# Altium PCB PCB1.2.PcbDoc (part 2 of 2)
Units mil, origin at the board's own origin, x right, y up, seen from the top; angles counter-clockwise.
Board outline 1692.91 x 1692.91 mil, 4 copper layers (Top Layer, Mid-Layer 1, Mid-Layer 2, Bottom Layer); 153 components, 106 nets, 555 pads, 234 vias.
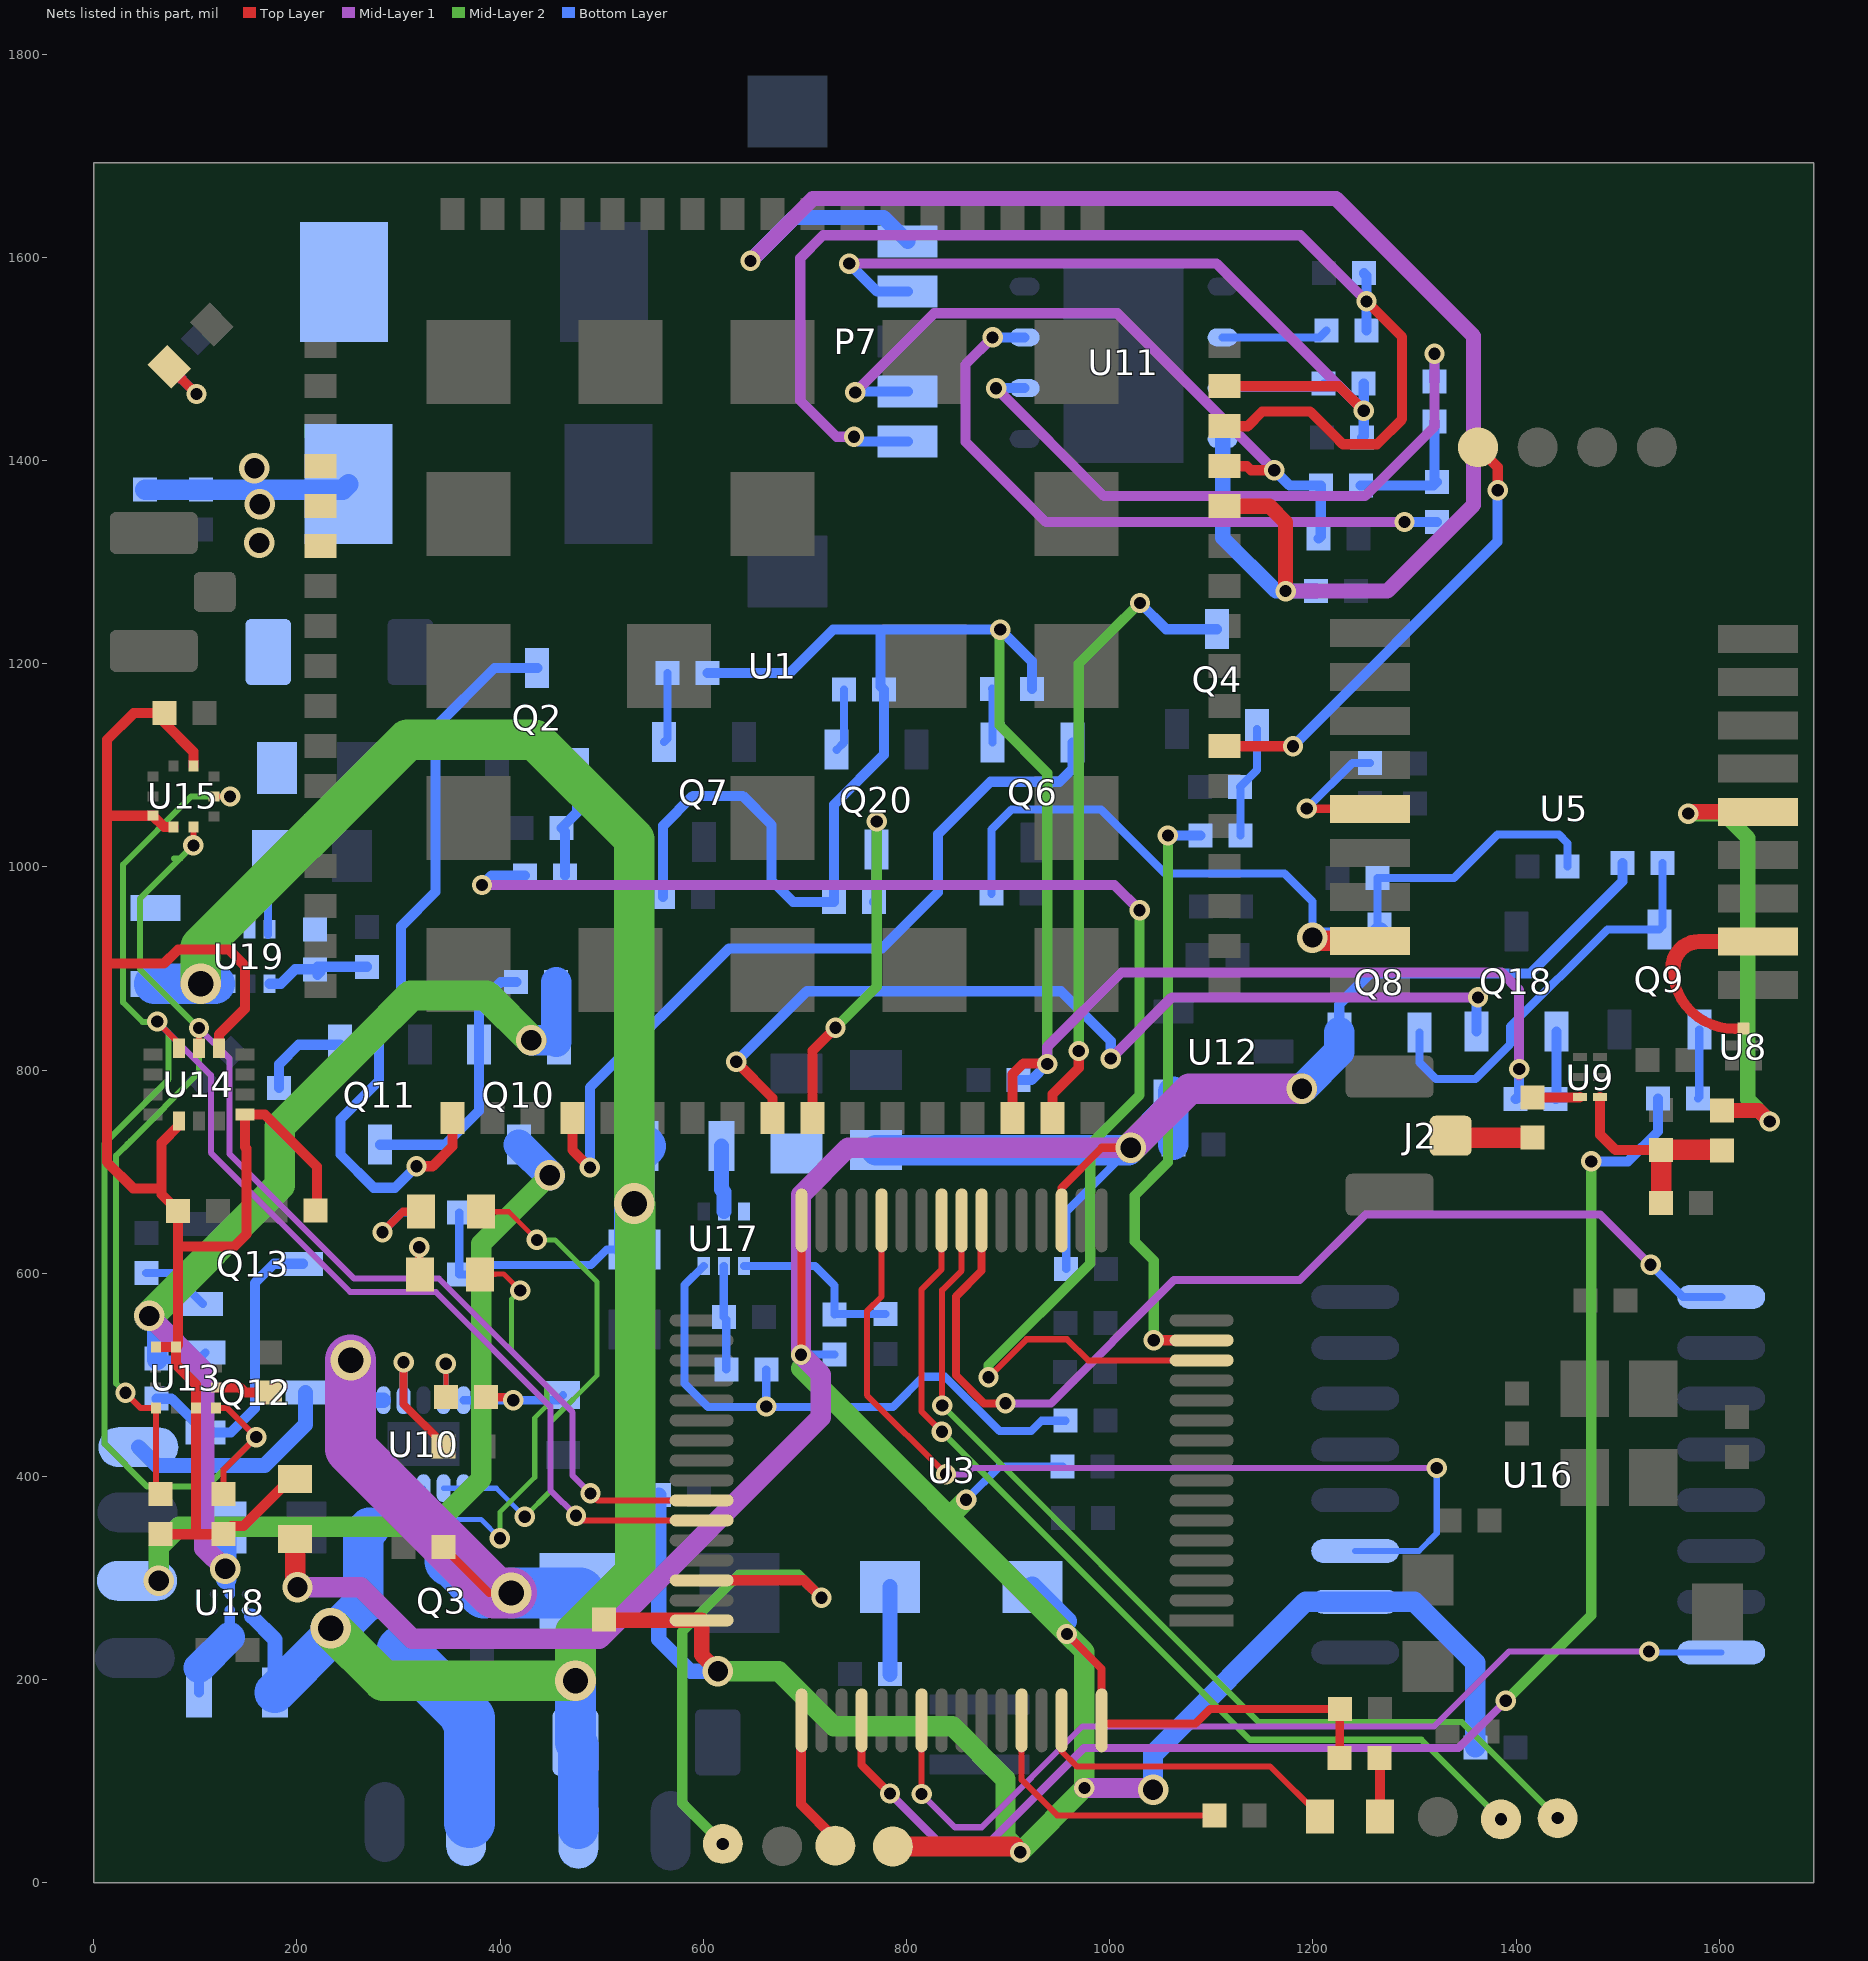
[diagram p4: the nets of this part, all layers, seen from the top]

## Via types
v1: diameter 20, hole 12, Top Layer to Bottom Layer, tented both sides, 205 vias
v2: diameter 30, hole 20, Top Layer to Bottom Layer, tented both sides, 22 vias
v3: diameter 40, hole 25, Top Layer to Bottom Layer, tented both sides, 7 vias

## Nets (pads, with @x,y where several pads share a name; then routed paths per layer and width w, separated by ;. In a path a pad name is that pad's centre, name@x,y a point inside that pad or via, vN(x,y) a via of type N, cw(c..) or ccw(c..) an arc to the next point about the centre after c; other vN are vias at no path point) (continued)
NetC27_1: C27.1 D2.2 Q3.3 U10.1 | length 548
  Top Layer w8: C27.1@344.14,330.73 389.4,285.46
  Mid-Layer 1 w50: v3(252.94,514.63) 252.94,427.38 394.85,285.46 v3(411.18,285.46)
  Bottom Layer w15: 252.94,485.68 263.44,475.18 U10.1@285.42,475.18
  Bottom Layer w40: 252.94,485.68 v3(252.94,514.63)
  Bottom Layer w50: Q3.3@350.85,316.89 353.06,316.89 384.49,285.46 ; v3(411.18,285.46) D2.2@478.46,285.46
NetC40_1: C40.1 U13.5 | length 54.7
  Top Layer w10: U13.5@121.05,487.53 144.24,487.53 149.13,482.65 C40.1@173.68,482.65
NetD1_2: D1.2 R7.1 | length 86
  Bottom Layer w15: R7.1@783.93,205.5 D1.2@783.93,291.5
NetJ2_1: J2.1 L3.2 | length 81.2
  Top Layer w20: J2.1@1335.61,735.51 1337.51,733.61 L3.2@1415.99,733.61
NetL2_1: L2.1 U5.14 | length 477.7
  Top Layer w15: v1(1569.58,1052.51) 1571.35,1054.28 U5.14@1638.34,1054.28 ; L2.1@1602.59,760.37 1638.95,760.37 v1(1649.81,749.51)
  Mid-Layer 2 w15: v1(1569.58,1052.51) 1604.11,1052.51 1628.15,1028.46 1628.15,771.17 v1(1649.81,749.51)
NetL3_1: L3.1 U9.3 | length 47.4
  Top Layer w10: L3.1@1415.99,772.98 1462.52,772.98 U9.3@1463.11,773.56
NetL4_1: L4.1 U17.5 | length 65.4
  Bottom Layer w15: L4.1@618.1,725.29 618.1,682.53 620.49,680.14 U17.5@620.49,660.92
NetL5_2: L5.2 U18.B1 | length 93.6
  Bottom Layer w10: L5.2@103.63,187.47 L5.2@103.63,211.66 ; 133.93,241.96 U18.B1@133.93,268.51
  Bottom Layer w30: L5.2@103.63,211.66 133.93,241.96
NetL6_1: L6.1 U19.5
NetLED1_2: LED1.2 R9.1 | length 75.7
  Top Layer w10: LED1.2@74.52,1492.25 v1(101.27,1465.5)
  Bottom Layer w10: R9.1@74.52,1492.25 v1(101.27,1465.5)
NetLED2_1: LED2.1 R29.2 | length 90.5
  Top Layer w8: v1(284.31,640.55) 304.43,660.67 LED2.1@322.31,660.67
  Bottom Layer w8: v1(284.31,640.55) 303.64,659.88 R29.2@320.45,659.88
NetLED2_2: LED2.2 U10.6 U10.7 | length 510.4
  Top Layer w5: LED2.2@381.37,660.67 408.62,660.67 ; 419.55,649.74 408.62,660.67 ; v1(436.28,633.01) 408.62,660.67
  Mid-Layer 2 w5: v1(424.43,360.52) 449.62,385.71 449.62,453.67 495.61,499.66 495.61,591.52 454.12,633.01 v1(436.28,633.01)
  Bottom Layer w5: U10.7@344.48,388.56 U10.6@364.16,388.56 396.38,388.56 v1(424.43,360.52)
NetLED4_1: LED4.1 R12.2 | length 54.1
  Top Layer w8: v1(320.45,625.74) 320.45,599.85 LED4.1@321.42,598.88
  Bottom Layer w8: R12.2@320.45,598.88 v1(320.45,625.74)
NetLED4_2: LED4.2 U10.8 | length 446.7
  Top Layer w5: 395.4,598.88 LED4.2@380.48,598.88 381.17,599.57 403.46,599.57 v1(419.94,583.09)
  Mid-Layer 2 w5: v1(399.84,339.28) 399.84,364.94 434.2,399.3 434.2,457.81 446,469.62 446,488.88 411.37,523.51 411.37,574.52 v1(419.94,583.09)
  Bottom Layer w5: U10.8@324.79,388.56 324.79,373.35 340.21,357.93 381.19,357.93 v1(399.84,339.28)
NetLED5_1: LED5.1 R65.1 | length 57.6
  Top Layer w10: R65.1@1265.84,122.92 1266.17,122.59 LED5.1@1266.17,65.51
NetLED5_2: LED5.2 U3.62 | length 311.5
  Top Layer w6: U3.62@952.78,160.11 952.78,129.42 967.45,114.75 1143.11,114.75 1157.87,114.75 LED5.2@1207.11,65.51
NetQ2_1: Q2.1 R10.1 R11.1 | length 113.5
  Bottom Layer w10: R10.1@463.84,991.78 463.84,1035.01 R11.1@460.5,1038.36 475.97,1053.83 Q2.1@475.97,1097.49
NetQ4_1: Q4.1 R4.1 R16.1 | length 111.7
  Bottom Layer w8: R16.1@1128.89,1031.08 1128.89,1078.28 R4.1@1128.41,1078.75 1145.18,1095.52 Q4.1@1145.18,1135.64
NetQ6_1: Q6.1 R28.1 | length 53.1
  Bottom Layer w8: R28.1@884.13,1175.39 884.79,1174.72 Q6.1@884.79,1122.61
NetQ7_1: Q7.1 R31.1 | length 69.5
  Bottom Layer w8: Q7.1@561.39,1122.86 564.73,1126.2 R31.1@564.73,1190.95
NetQ8_1: Q8.1 Q9.3 R33.2 | length 405.9
  Bottom Layer w8: Q8.1@1304.83,837.26 1304.83,807.75 1321.37,791.21 1359.95,791.21 1394.11,825.37 1394.11,842.89 1489.87,938.65 Q9.3@1540.98,938.65 ; Q9.3@1544.19,941.86 R33.2@1544.19,1003.9
NetQ9_1: Q9.1 R34.1 | length 68.5
  Bottom Layer w8: R34.1@1579.09,772.22 1580.35,773.48 Q9.1@1580.35,840.22
NetQ10_1: Q10.1 Q11.3 R36.2 | length 262.2
  Bottom Layer w10: Q11.3@281.74,726.64 345.85,726.64 379.26,760.05 Q10.1@379.26,825.07 379.26,865.45 400.45,886.64 R36.2@415.92,886.64
NetQ11_1: Q11.1 R37.1 | length 95.6
  Bottom Layer w10: R37.1@182.56,782.38 182.56,805.99 201.63,825.07 Q11.1@239.36,825.07 ; Q11.1@239.36,825.07 240.87,823.56 Q11.1@242.37,825.07 Q11.1@239.36,825.07
NetQ12_1: Q12.1 Q13.3 R50.2 | length 299.2
  Bottom Layer w10: R50.2@61.74,476.66 76.78,476.66 Q12.1@110.01,443.42 134.9,443.42 158.78,467.3 158.78,590.63 177.58,609.43 Q13.3@206.12,609.43
NetQ13_1: Q13.1 R51.1 | length 68.4
  Bottom Layer w8: R51.1@51.85,600.34 77.41,600.34 Q13.1@107.7,570.06
NetQ18_1: Q18.1 R40.1 | length 66.9
  Bottom Layer w10: R40.1@1439.1,771.53 1439.74,772.17 Q18.1@1439.74,838.2
NetQ20_1: Q20.1 R44.1 | length 62.2
  Bottom Layer w8: Q20.1@731.43,1115.4 738.48,1122.44 R44.1@738.48,1174.67
NetR3_1: R3.1 U3.60 | length 263.1
  Top Layer w6: U3.60@913.41,160.11 913.41,101.53 948.37,66.57 R3.1@1103.44,66.57
NetR13_1: R13.1 U10.2 | length 136.4
  Top Layer w8: v1(305.11,512.47) 305.11,471.24 344.42,431.93 R13.1@344.42,429.61
  Bottom Layer w8: U10.2@305.11,475.18 v1(305.11,512.47)
NetR14_1: R14.1 R15.2 U10.5 | length 128.2
  Top Layer w8: R14.1@386.04,478.12 410.1,478.12 v1(413.05,475.18)
  Bottom Layer w8: U10.5@364.16,475.18 v1(413.05,475.18) 457.2,475.18 R15.2@462.09,480.07
NetR14_2: R14.2 U10.4 | length 69.8
  Top Layer w5: R14.2@346.67,478.12 v1(346.67,511.1)
  Bottom Layer w5: U10.4@344.48,475.18 346.67,477.37 v1(346.67,511.1)
NetR18_1: R18.1 U5.5 | length 143.6
  Top Layer w8: v1(1194,1057.6) 1194.32,1057.28 U5.5@1256.45,1057.28
  Bottom Layer w8: v1(1194,1057.6) 1238.91,1102.51 R18.1@1256.45,1102.51
NetR19_2: R19.2 R20.2 U19.1 | length 106.4
  Bottom Layer w10: U19.1@173.26,885.12 184.13,885.12 198.34,899.33 R19.2@218.11,899.33 220.58,901.81 R20.2@268.86,901.81 ; R19.2@220.26,893.96 R19.2@223.01,896.72
NetR21_2: R21.2 R48.2 U17.1 | length 175.9
  Bottom Layer w8: U17.1@640.18,607.35 710.1,607.35 729.29,588.16 R21.2@729.29,559.66 729.71,560.07 R48.2@779.48,560.07
NetR23_2: R23.2 U11.7 | length 101.3
  Bottom Layer w8: U11.7@1111.27,1471.29 1206.3,1471.29 R23.2@1210.73,1475.71
NetR25_1: R25.1 U11.3 | length 641.9
  Mid-Layer 1 w10: v1(884.82,1521.29) 858.21,1494.67 858.21,1418.56 937.27,1339.5 981.2,1339.5 v1(1290.33,1339.5)
  Bottom Layer w10: v1(884.82,1521.29) U11.3@916.39,1521.29 ; v1(1290.33,1339.5) R25.1@1322.06,1339.5
NetR25_2: R25.2 R26.2 R27.2 | length 136.8
  Bottom Layer w10: R27.2@1247.24,1375.58 1318.77,1375.58 R25.2@1322.06,1378.87 1319.7,1381.24 R26.2@1319.7,1438.52
NetR26_1: R26.1 U11.2 | length 630.7
  Mid-Layer 1 w10: v1(888.28,1471.29) 994.34,1365.22 1251.46,1365.22 1319.7,1433.46 v1(1319.7,1505.17)
  Bottom Layer w10: v1(888.28,1471.29) U11.2@916.39,1471.29 ; R26.1@1319.7,1477.89 v1(1319.7,1505.17)
NetR35_2: R35.2 R49.2 U17.2 | length 103
  Bottom Layer w8: U17.2@620.49,607.35 620.24,607.09 R35.2@620.24,557 622.72,554.53 R49.2@622.72,505.47
NetR39_2: R39.2 U11.6 | length 105.1
  Bottom Layer w8: U11.6@1111.27,1521.29 1206.53,1521.29 R39.2@1213.46,1528.22
POWER_CTRL_GPS: R34.2 U3.52 | length 1459.8
  Top Layer w8: U3.52@755.93,160.11 755.93,116.03 v1(783.79,88.16)
  Mid-Layer 1 w8: v1(783.79,88.16) 821.87,50.09 ; 809.35,62.61 821.87,50.09 ; v1(1389.88,179.29) 1343.47,132.88 974.72,132.88 883.48,41.65 830.31,41.65 821.87,50.09
  Mid-Layer 2 w10: v1(1389.88,179.29) 1474.01,263.42 v1(1474.01,710.23)
  Bottom Layer w10: v1(1474.01,710.23) 1510.31,710.23 1539.72,739.65 R34.2@1539.72,772.22
PWRKEY: Q2.3 U1.1 | length 752
  Top Layer w10: v1(317.77,705.47) 333.7,705.47 353.28,725.05 U1.1@353.28,752.75
  Bottom Layer w10: v1(317.77,705.47) 296.67,684.37 275.65,684.37 243,717.02 243,751.85 281.03,789.88 281.03,843 302.65,864.62 302.65,941.73 336.37,975.45 336.37,1137.7 394.59,1195.91 Q2.3@436.6,1195.91
RESET: Q4.3 U1.16 | length 644.8
  Top Layer w10: U1.16@943.83,752.75 943.83,776.25 969.68,802.1 v1(969.68,818.91)
  Mid-Layer 2 w10: v1(969.68,818.91) 969.68,1199.97 1000.79,1231.09 ; 1011.6,1241.9 1000.79,1231.09 ; v1(1029.86,1259.82) 1029.53,1259.82 1000.79,1231.09
  Bottom Layer w10: v1(1029.86,1259.82) 1055.62,1234.07 Q4.3@1105.81,1234.07
RF_IN: U5.11 U8.1 | length 202.3
  Top Layer w10: 1554.41,900.63 ccw(c1614.21,900.63) U8.1@1623.77,841.6
  Top Layer w15: 1554.41,900.63 cw(c1580.39,900.63) 1580.39,926.61 U5.11@1638.33,926.61
RI: Q6.2 U1.4 | length 798.6
  Top Layer w10: U1.4@471.39,752.75 471.39,721.34 v1(488.45,704.27)
  Bottom Layer w10: v1(488.45,704.27) 488.45,782.89 625.51,919.94 775.96,919.94 831.15,975.13 831.15,1032.33 882.76,1083.94 950.69,1083.94 963.53,1096.78 Q6.2@963.53,1122.61
RXD3: T18.1 U3.25 | length 933
  Top Layer w6: U3.25@834.67,652.24 834.67,604.06 814.73,584.12 814.73,464.25 v1(834.91,444.06)
  Mid-Layer 2 w6: v1(834.91,444.06) 1093.79,185.18 1138.02,140.95 1306.93,140.95 v1(1385.16,62.72)
SCL: R22.2 U3.42 U13.1 U14.13 U15.2 | length 1572.6
  Top Layer w6: v1(31.31,482.48) 46.43,467.35 U13.1@61.5,467.35 61.5,387.16 R22.2@65.98,382.68 ; v1(98.22,1021.3) U15.2@98.22,1039.41 ; U14.13@103.64,821.61 v1(103.64,841.48) ; v1(488.98,383.49) 495.82,376.65 U3.42@598.45,376.65
  Mid-Layer 1 w6: v1(103.64,841.48) 133.91,811.22 133.91,717.42 256.55,594.78 339.93,594.78 471.47,463.24 471.47,401 v1(488.98,383.49)
  Mid-Layer 2 w6: v1(31.31,482.48) 22.04,491.75 22.04,715.85 36.38,730.19 ; 33.15,726.96 36.38,730.19 ; 79.4,1008.44 85.36,1008.44 ; v1(98.22,1021.3) 85.36,1008.44 ; 36.38,730.19 103.64,797.45 v1(103.64,841.48) 45.59,899.54 45.59,968.67 85.36,1008.44
SCLK: U3.55 U16.16 | length 945.2
  Top Layer w6: v1(814.99,87.56) U3.55@814.99,160.11
  Mid-Layer 1 w6: v1(814.99,87.56) 847.65,54.9 874.13,54.9 973.32,154.09 1319.47,154.09 1393.3,227.92 v1(1530.99,227.92)
  Bottom Layer w6: v1(1530.99,227.92) 1532.13,226.77 U16.16@1602,226.77
SDA: R24.1 U3.43 U13.4 U14.14 U15.4 | length 1947.8
  Top Layer w6: v1(62.6,847.89) 83.96,826.53 U14.14@83.96,821.61 ; U15.4@118.39,1069.43 v1(134.37,1069.43) ; U13.4@120.56,467.35 131.56,467.35 v1(160.06,438.85) 127.98,406.77 R24.1@127.98,382.68 ; v1(474.84,361.49) 479.37,356.96 U3.43@598.45,356.96
  Mid-Layer 1 w6: v1(62.6,847.89) 115.47,795.02 115.47,718.82 252.61,581.67 336.9,581.67 449.65,468.92 449.65,386.68 v1(474.84,361.49)
  Mid-Layer 2 w6: v1@62.6,847.42 48.38,847.42 28.91,866.88 28.91,1002.28 96.07,1069.43 v1(134.37,1069.43) ; v1(62.6,847.89) 73.9,836.59 73.9,791.15 10.76,728.01 10.76,432.14 52.8,390.11 111.32,390.11 v1(160.06,438.85)
SIM_CLK: C17.2 P7.1 R39.1 U1.32 | length 1248.3
  Top Layer w10: U1.32@1113.12,1433.85 1135.87,1433.85 1150.31,1448.29 1197.4,1448.29 1221.31,1424.38 1229.55,1416.14 1263.24,1416.14 1287.93,1440.83 1287.93,1521.57 v1(1252.83,1556.68)
  Mid-Layer 1 w10: v1(748.33,1423.49) 731.17,1423.49 695.44,1459.21 695.44,1599.26 717.92,1621.75 1187.75,1621.75 v1(1252.83,1556.68)
  Bottom Layer w10: v1(748.33,1423.49) 753.14,1418.68 P7.1@801.29,1418.68 ; C17.2@1250.3,1584.43 1252.83,1581.9 v1(1252.83,1556.68) R39.1@1252.83,1528.22
SIM_DATA: C18.2 P7.2 R27.1 U1.31 | length 716.5
  Top Layer w10: U1.31@1113.12,1394.48 1135.26,1394.48 1139.22,1390.53 v1(1162.02,1390.53)
  Mid-Layer 1 w10: v1(749.63,1467.14) 827.46,1544.97 1007.57,1544.97 v1(1162.02,1390.53)
  Bottom Layer w10: v1(749.63,1467.14) 750.38,1467.89 P7.2@801.29,1467.89 ; v1(1162.02,1390.53) 1176.97,1375.58 R27.1@1207.87,1375.58 1207.87,1325.42 C18.2@1205.61,1323.16
SIM_PWR: R10.2 U3.14 | length 1459.8
  Top Layer w6: v1(880.84,497.73) 918.32,535.21 958.03,535.21 978.8,514.44 U3.14@1088.19,514.44 ; U3.14@1088.19,512.06 U3.14@1090.58,514.44
  Mid-Layer 1 w10: v1(382.31,982.24) 1004.67,982.24 v1(1029.56,957.36)
  Mid-Layer 2 w10: v1(880.84,497.73) 880.84,509.76 980.89,609.81 980.89,726.85 1029.56,775.52 v1(1029.56,957.36)
  Bottom Layer w10: v1(382.31,982.24) 391.84,991.78 R10.2@424.47,991.78
SIM_RST: C16.2 P7.4 R23.1 U1.33 | length 836.2
  Top Layer w10: U1.33@1113.12,1473.22 1225.85,1473.22 v1(1250.1,1448.97)
  Mid-Layer 1 w10: v1(743.74,1593.89) 1105.18,1593.89 1106.37,1592.7 v1(1250.1,1448.97)
  Bottom Layer w10: v1(743.74,1593.89) 771.31,1566.32 P7.4@801.29,1566.32 ; C16.2@1248.6,1422.54 1250.1,1424.04 v1(1250.1,1448.97) R23.1@1250.1,1475.71
SIM_RST1: R16.2 U3.15 | length 597.5
  Top Layer w10: v1(1043.38,534.13) U3.15@1090.58,534.13
  Mid-Layer 2 w10: v1(1043.38,534.13) 1043.38,612.75 1024.74,631.38 1024.74,676.65 1057.34,709.25 v1(1057.34,1031.08)
  Bottom Layer w10: v1(1057.34,1031.08) R16.2@1089.52,1031.08
SIM_RXD: Q20.3 R46.1 U1.10 | length 398.5
  Top Layer w10: U1.10@707.61,752.75 707.61,819.25 v1(730.15,841.8)
  Mid-Layer 2 w10: v1(730.15,841.8) 770.8,882.45 v1(770.8,1044.79)
  Bottom Layer w10: R46.1@768.04,965.65 770.8,968.41 Q20.3@770.8,1016.97 v1(770.8,1044.79)
SIM_TXD: Q18.2 U1.9 | length 923.5
  Top Layer w10: v1(632.58,808.25) 668.24,772.59 U1.9@668.24,752.75
  Mid-Layer 1 w10: v1(1001.08,811.4) 1061.32,871.64 v1(1362.65,871.64)
  Bottom Layer w10: v1(632.58,808.25) 702.03,877.71 952.14,877.71 1001.08,828.77 v1(1001.08,811.4) ; Q18.2@1361,838.2 v1@1361,869.98
SIM_VDD: C14.2 P7.5 U1.30 U11.8 | length 1707.2
  Top Layer w15: U1.30@1113.12,1355.11 1157.4,1355.11 1173.23,1339.28 v1(1173.23,1271.52)
  Mid-Layer 1 w15: v1(646.52,1596.55) 707.86,1657.89 1222.93,1657.89 1358.2,1522.62 1358.2,1356.37 1273.34,1271.52 v1(1173.23,1271.52)
  Bottom Layer w15: v1(646.52,1596.55) 689.32,1639.35 777.47,1639.35 P7.5@801.29,1615.53 ; U11.8@1111.27,1421.29 1111.27,1324.07 1163.83,1271.52 C14.2@1203.24,1271.52
SPI_RESET: U3.28 U16.3 | length 925.4
  Top Layer w6: U3.28@775.62,652.24 775.62,577.24 761.16,562.79 761.16,480.11 v1(839.03,402.25)
  Mid-Layer 1 w6: v1(839.03,402.25) 858.89,402.25 865.09,408.45 v1(1322,408.45)
  Bottom Layer w6: U16.3@1241.77,326.77 1304.52,326.77 1322,344.26 v1(1322,408.45)
SWCLK: T10.1 U3.49 | length 137.6
  Top Layer w10: U3.49@696.88,160.11 696.38,159.62 696.38,77.22 730.08,43.52 T10.1@730.08,36.69
SWD: T9.1 U3.46 | length 520.2
  Top Layer w10: U3.46@598.45,297.91 699.11,297.91 v1(716.34,280.68)
  Mid-Layer 2 w10: v1(619.24,38.47) 579.35,78.36 579.35,219.27 579.35,247.54 635.23,303.42 673.54,303.42 693.6,303.42 v1(716.34,280.68)
TXD3: T11.1 U3.24 | length 964.3
  Top Layer w6: v1(835.19,469.95) 835.19,583.59 854.36,602.76 U3.24@854.36,652.24
  Mid-Layer 2 w6: v1(835.19,469.95) 1146.85,158.29 1344.1,158.29 1346.59,158.29 v1(1441.02,63.86)
VBAT: C44.1 D4.2 L4.2 L5.1 L6.2 R2.1 R12.1 R29.1 R49.1 T17.1 U10.10 U17.3 U18.A1 U19.3 | length 3190
  Mid-Layer 2 w40: v3(105.42,885.25) 105.42,921.66 308.92,1125.17 434.36,1125.17 532.08,1027.45 v3(532.08,668.72) ; v3(233.34,250.89) 285.22,199.01 v3(474.3,199.01) 474.3,246.2 533.08,304.98 v3@533.08,667.72
  Bottom Layer w8: R29.1@359.82,659.88 R12.1@359.82,598.88 379.13,598.88 388.53,608.28 489.68,608.28 505.08,623.68 C44.1@532.3,623.68 ; U17.3@600.49,607.35 581.66,588.51 581.66,491.53 604.54,468.64 738.97,468.64 786.72,468.64 816.39,498.32 838.05,498.32 891.45,444.92 922.89,444.92 932.93,454.96 R2.1@956.64,454.96 ; v1(662.09,468.92) R49.1@662.09,505.47
  Bottom Layer w15: 155.64,262.55 178.44,239.76 L5.1@178.44,187.47 ; 285.42,362.82 U10.10@285.42,388.56
  Bottom Layer w20: L6.2@59.95,885.12 L6.2@60.79,885.12 ; 265.33,342.73 285.42,362.82
  Bottom Layer w40: L6.2@59.95,885.12 60.79,885.12 v3@119.17,885.12 ; L5.1@178.44,187.47 v3@233.34,242.37 ; v3(233.34,250.89) v3@233.34,242.37 ; 271.45,349.47 265.33,343.34 265.33,342.73 265.33,274.36 v3@233.34,242.37 ; v3(474.3,199.01) D4.2@474.3,138.31 477.15,135.46 T17.1@477.15,53.34 ; C44.1@532.3,623.68 532.08,623.9 v3(532.08,668.72) 532.08,714.07 L4.2@543.3,725.29
VBAT_OUT: C24.2 C29.1 C31.1 C43.2 C47.1 C48.1 D3.2 R19.1 U1.55 U1.56 U1.57 U19.6 | length 281.9
  Bottom Layer w8: U19.6@171.7,933.33 171.7,1007.05 C47.1@175.66,1011
  Bottom Layer w20: C43.2@50.52,1371.36 C24.2@105.52,1371.36 245.33,1371.36 C29.1@250.82,1376.86
  other v2: 162.91,1318.95 163.46,1357.04 158.34,1392.39
VBUS: T1.1 U1.24 | length 452.4
  Top Layer w10: U1.24@1113.12,1118.89 v1(1180.52,1118.89) ; T1.1@1362.58,1413.02 1382.03,1393.58 v1(1382.03,1370.73)
  Bottom Layer w10: v1(1180.52,1118.89) 1381.66,1320.04 v1@1381.66,1370.21
VCC_3.3V_S: C32.2 Q8.3 R30.2 R42.2 U5.8 | length 867.6
  Top Layer w20: v2@1202.87,927.36 U5.8@1256.45,927.36
  Bottom Layer w8: R30.2@883.71,973.7 883.71,1036.94 903.5,1056.74 991.53,1056.74 1054.61,993.66 1172.09,993.66 1199.68,966.07 v2(1199.68,930.55) ; Q8.3@1265.46,935.68 1263.61,937.54 C32.2@1263.61,989.17 1339.04,989.17 1381.75,1031.88 1442.3,1031.88 1450.82,1023.35 R42.2@1450.82,1000.45
  Bottom Layer w20: v2(1199.68,930.55) 1260.32,930.55 Q8.3@1265.46,935.68
VCC_3V: C11.2 C12.2 C13.2 C15.2 C28.1 C34.1 C37.1 C50.2 D1.1 FB2.1 Q8.2 R6.1 R21.1 R33.1 R65.2 T19.1 U3.19 U3.32 U3.48 U3.64 U12.1 U16.2 U17.6 | length 5336.8
  Top Layer w8: v1(696.27,519.95) 696.88,520.55 U3.32@696.88,652.24 ; U3.19@952.78,652.24 952.78,684.15 992.28,723.64 v2(1020.67,723.64) ; v1(957.96,245.07) 992.15,210.88 U3.64@992.15,160.11 ; U3.64@993.7,158.57 992.15,157.02 1084.58,157.02 1098.75,171.19 C12.2@1226.54,171.19 R65.2@1226.47,122.92 R65.2@1226.47,122.92
  Top Layer w15: C13.2@502.36,258.54 U3.48@598.45,258.54 598.45,224.48 v2(614.53,208.41)
  Top Layer w20: v2@198.31,291 FB2.1@198.31,338.35 ; T19.1@786.61,35.87 v1@906.41,35.87
  Mid-Layer 1 w20: v2(200.67,291) 262.93,291 313.43,240.5 498,240.5 715.73,458.23 715.73,500.5 v1(696.27,519.95) 696.27,677.42 742.5,723.64 v2(1020.67,723.64) ; v1(975.16,93.52) v2@1042.72,93.52
  Mid-Layer 1 w30: v2(1020.67,723.64) 1078.61,781.58 v2(1189.3,781.58)
  Mid-Layer 2 w20: v2(614.53,208.41) 674.36,208.41 728.4,154.37 845.43,154.37 897.49,102.31 897.49,44.79 v1(911.96,30.32) v1(975.16,93.52) 975.16,227.87 v1(957.96,245.07) 696.27,506.76 ; 849.89,368.34 v1(858.8,377.25)
  Bottom Layer w8: v1@696.61,520.29 R21.1@729.29,520.29 ; v1(858.8,377.25) 891.53,409.98 R6.1@953.84,409.98 ; C15.2@957.26,604.27 957.26,660.23 v2@1018.34,721.31
  Bottom Layer w10: Q8.2@1226.09,837.26 1226.09,864.75 1256.61,895.27 1414.29,895.27 1504.82,985.81 R33.1@1504.82,1003.9
  Bottom Layer w15: C50.2@556.26,381.79 556.26,239.65 587.51,208.41 v2(614.53,208.41)
  Bottom Layer w20: D1.1@923.93,279.1 D1.1@923.93,291.5 957.96,257.47 ; v2(1042.72,91.7) 1042.72,126.72 1192.77,276.77 U16.2@1241.77,276.77 1299.96,276.77 1359.99,216.73 C11.2@1359.99,133.32
  Bottom Layer w30: C28.1@770.13,721.31 v2@1018.34,721.31 ; v2(1020.67,723.64) 1062.85,765.82 ; C37.1@1062.85,726.85 1062.85,765.82 ; U12.1@1062.85,778.85 1062.85,765.82 ; v2(1189.3,781.58) 1226.09,818.37 Q8.2@1226.09,837.26
VCC_3V_SENSOR: C35.2 C38.2 C41.2 FB2.2 R22.1 R24.2 U13.3 U13.9 U13.10 U14.5 U14.8 U14.12 U15.1 U15.6 U15.10 | length 1869.4
  Top Layer w10: U13.10@61.5,527.39 U13.9@81.19,527.39 ; R22.1@65.98,343.31 101.44,343.31 ; U15.1@78.53,1039.41 69.37,1039.41 U15.10@58.35,1050.43 13.92,1050.43 13.21,1051.14 ; C41.2@82.61,661.89 66.91,677.59 66.91,683.67 ; 83.19,648.16 83.19,626.31 ; U14.5@83.96,749.95 83.96,745.59 66.91,728.54 66.91,683.67 ; U15.6@98.22,1099.45 98.22,1113.55 70,1141.77 C35.2@70,1151.43 39.37,1151.43 13.21,1125.27 13.21,1051.14 ; U14.12@123.33,821.61 123.33,834.96 148.87,860.5 148.87,902.87 132.88,918.86 83.15,918.86 69.19,904.89 14.6,904.89 13.21,903.5 ; R24.2@131.92,343.31 R24.2@127.98,343.31 ; R24.2@131.92,347.24 R24.2@127.98,343.31 ; FB2.2@198.31,397.41 193.56,397.41 147.42,351.27 135.95,351.27 R24.2@127.98,343.31 ; C38.2@218.26,661.86 219.82,663.41 219.82,705.1 ; 219.82,684.23 219.82,705.1 ; 13.21,903.5 13.21,1051.14 ; 13.21,903.5 13.21,709.48 39.02,683.67 66.91,683.67 ; U13.9@81.19,527.39 81.19,510.06 100.87,490.37 U13.3@100.87,467.35 100.87,343.87 101.44,343.31 ; U13.9@81.19,527.39 83.19,529.4 83.19,626.31 ; 83.19,626.31 112.98,626.31 113.09,626.42 138.51,626.42 150.51,638.43 150.51,722.93 148.92,724.53 U14.8@148.92,756.25 168.67,756.25 219.82,705.1 ; 101.44,343.31 R24.2@127.98,343.31
VCC_5V: C46.1 Q10.2 Q12.2 R36.1 R50.1 U18.B2 | length 1095.5
  Mid-Layer 1 w20: v2(54.76,558.13) 109.01,503.88 109.01,329.56 v2(129.41,309.15)
  Mid-Layer 2 w30: v2(54.76,558.13) 183.26,686.62 183.26,744.44 268.39,829.57 312.32,873.5 386.65,873.5 v2(430.74,829.41)
  Bottom Layer w8: R50.1@62.79,516.03 R50.1@61.74,516.03 ; R50.1@67.88,522.16 62.79,517.08 R50.1@61.74,516.03 ; Q12.2@110.01,522.16 102.83,514.97 62.79,514.97 R50.1@61.74,516.03
  Bottom Layer w10: v2@130.61,298.82 133.93,295.5 U18.B2@133.93,284.26
  Bottom Layer w20: v2(54.76,558.13) 62.79,550.1 62.79,517.08 62.79,516.03 R50.1@62.79,514.97 ; v2@130.61,298.82 C46.1@130.61,350.05
  Bottom Layer w30: v2(430.74,829.41) Q10.2@453.66,829.41 ; Q10.2@455.29,827.78 R36.1@455.29,886.64
VCC_5V1: Q10.3 T4.1 | length 747.5
  Mid-Layer 2 w20: v2(64.06,297.6) 64.06,330.46 84.24,350.64 334.54,350.64 381.52,397.62 381.52,629.17 408.82,656.47 v2(448.81,696.46)
  Bottom Layer w30: Q10.3@418.63,726.64 v2(448.81,696.46)
VCC_5V2: Q12.3 T5.1 | length 220.2
  Bottom Layer w15: T5.1@44.06,429.02 62.13,410.96 128.38,410.96 136.6,410.96 168.33,410.96 208.44,451.06 Q12.3@208.44,482.79
VCC_IN: Q3.2 T15.1 | length 200.4
  Bottom Layer w50: Q3.2@303.43,228.73 366.63,165.53 ; 366.63,162.1 366.63,165.53 ; T15.1@370.06,59.39 370.06,162.1 366.63,165.53
VCC_RF: C23.2 C25.2 L2.2 U9.4 | length 215.7
  Top Layer w10: U9.4@1482.79,773.56 1482.79,736.52 1497.76,721.55 C25.2@1542.8,721.55
  Top Layer w20: C23.2@1542.59,669.2 1542.8,669.4 C25.2@1542.8,721.55 1602.04,721.55 L2.2@1602.59,721
VDD_EXT: C33.2 R28.2 R31.2 R32.2 R40.2 R44.2 R46.2 U1.15 | length 2189.7
  Top Layer w10: U1.15@904.46,752.75 904.46,796.01 915.09,806.64 938.14,806.64 v1(938.66,806.11)
  Mid-Layer 1 w10: v1(938.66,806.11) 938.66,822.98 1011.77,896.08 1385.81,896.08 1403.1,878.79 v1(1403.1,801.12) v1@1403.1,795.05
  Mid-Layer 2 w10: v1@891.67,1232.38 891.67,1139.38 938.66,1092.39 v1(938.66,806.11)
  Bottom Layer w10: R32.2@560.55,970.47 560.55,1040.73 589.79,1069.96 638.78,1069.96 667.29,1041.46 667.29,986.73 688.37,965.65 R46.2@728.67,965.65 728.67,1061.3 777.85,1110.47 R44.2@777.85,1174.67 774.6,1177.91 774.6,1233.63 ; R31.2@604.1,1190.95 685.05,1190.95 727.73,1233.63 774.6,1233.63 ; C33.2@910.11,790.24 922.8,790.24 v1(938.66,806.11) v1@939.19,806.64 ; R28.2@923.5,1175.39 923.5,1202.5 v1(892.37,1233.63) 774.6,1233.63 ; R40.2@1399.73,771.53 1403.1,774.91 v1(1403.1,801.12)
WP: U3.23 U16.9 | length 1038.3
  Top Layer w8: U3.23@874.04,652.24 874.04,602.59 848.85,577.4 848.85,499.71 876.44,472.12 v1(897.54,472.12)
  Mid-Layer 1 w8: v1(897.54,472.12) 942.2,472.12 1063.41,593.33 1187.16,593.33 1251.91,658.09 1482.87,658.09 v1(1532.49,608.46)
  Bottom Layer w8: v1(1532.49,608.46) 1564.18,576.77 U16.9@1602,576.77
pads on no net: P7. P7.0 U1.5 U1.6 U1.7 U1.8 U1.11 U1.12 U1.13 U1.14 U1.19 U1.20 U1.21 U1.22 U1.23 U1.25 U1.26 U1.34 U1.35 U1.36 U1.37 U1.38 U1.40 U1.41 U1.42 U1.43 U1.44 U1.47 U1.48 U1.49 U1.50 U1.51 U1.53 U1.66 U1.67 U1.68 U3.2 U3.9 U3.10 U3.11 U3.20 U3.26 U3.27 U3.29 U3.30 U3.33 U3.34 U3.38 U3.39 U3.40 U3.41 U3.51 U3.53 U3.54 U3.56 U3.61 U5.4 U5.6 U5.7 U5.9 U5.15 U5.16 U5.17 U5.18 U10.9 U11.4 U11.5 U13.2 U13.7 U13.11 U13.12 U14.4 U14.9 U14.10 U14.11 U15.7 U16.1 U16.4 U16.5 U16.6 U16.11 U16.12 U16.13 U16.14 Y1.3

## Polygon pours and split planes (outlines as drawn)
AGND on Top Layer "Mid-Layer 1-No Net" (solid, remove dead copper, pour order 1000): -191.89,1766.89 -182.36,1776.42 1885.47,1776.42 1885.47,64.92 1748.66,-71.89 1672.32,-148.23 234.41,-148.23 -156.89,-148.23 -239.61,-65.51 -166.46,7.64 -166.46,1779.61
AGND on Mid-Layer 1 "Mid-Layer 1-No Net" (solid, remove dead copper, pour order 1001): -191.89,1766.89 -182.36,1776.42 1885.47,1776.42 1885.47,64.92 1748.66,-71.89 1672.32,-148.23 234.41,-148.23 -156.89,-148.23 -239.61,-65.51 -166.46,7.64 -166.46,1779.61
AGND on Mid-Layer 2 "Mid-Layer 1-No Net" (solid, remove dead copper, pour order 1002): -191.89,1766.89 -182.36,1776.42 1885.47,1776.42 1885.47,64.92 1748.66,-71.89 1672.32,-148.23 234.41,-148.23 -156.89,-148.23 -239.61,-65.51 -166.46,7.64 -166.46,1779.61
AGND on Bottom Layer "Mid-Layer 1-No Net" (solid, remove dead copper, pour order 1003): -191.89,1766.89 -182.36,1776.42 1885.47,1776.42 1885.47,64.92 1748.66,-71.89 1672.32,-148.23 234.41,-148.23 -156.89,-148.23 -239.61,-65.51 -166.46,7.64 -166.46,1779.61

## Keep-outs
Keep-Out Layer:
  circle w5: c1633.86,59.06 r51.18
  circle w5: c59.06,1633.86 r51.18
  circle w5: c59.06,59.06 r51.18
  circle w5: c1633.86,1633.86 r51.18
  lines w5: 3.94,3.94 3.94,1688.98 1688.98,1688.98 1688.98,3.94 3.94,3.94

## Other copper
Top Layer:
  region net VBAT_OUT: 144,1303.61 254.69,1303.61 254.69,1408.18 144,1408.18
Bottom Layer:
  rectangle net AGND: 250,411 397.04,451
  region net VBAT: 506.55,642.11 561.31,642.11 586.73,616.69 606.21,616.69 606.94,615.97 606.94,598.6 606.07,597.73 605.88,597.93 590.73,597.93 587.06,594.25 512.28,594.25 506.55,599.99
  region net VCC_3V: 634.14,670.28 634.25,670.39 648.17,670.39 665.2,687.43 665.2,737.26 667.85,739.91 795.74,739.91 797.47,738.18 797.47,702.04 789.2,693.78 700.61,693.78 657.75,650.91 634.14,650.91
  region net NetL6_1: 149.29,958.6 149.37,958.52 149.37,941.04 150.74,939.67 158.62,939.67 158.62,974.75 141.47,991.9 102.35,991.9 86.6,976.14 35.71,976.14 32.25,972.69 32.25,948.75 35.76,945.24 85.65,945.24 99.21,958.8 147.81,958.8 147.81,942.6 149.43,940.98
  region net VBAT_OUT: 152.18,1588.74 213.46,1650.01 291.08,1650.01 303.35,1637.74 303.35,1316.98 219.28,1232.9 219.28,1209.35 203.83,1193.9 203.83,953.43 231.64,950.45 232.17,922.97 193.05,920.38 182.28,928.04 165.57,927.92 166.35,974.21 153.36,992.34

## Silkscreen, mask and mechanical layers (free items; w line width, h text height)
Top Overlay:
  rectangle: 1202,1471 1554,1665
  lines w5: 40.7,961.55 56.08,976.92 ; 60.34,1075.31 60.58,1075.31 ; 72.18,960.82 56.08,976.92 ; 144.9,855.9 161,872 ; 145.63,887.37 161,872 ; 961.3,7.48 961.54,7.48 ; 976.91,-7.89 961.54,7.48 ; 977.64,23.58 961.54,7.48 ; 1066.46,7.48 961.54,7.48 ; 56.08,976.92 56.08,872 161,872
  text "4G Tracer" at 1209,1372 h100
  text "V1.0" at 1325,1289 h100
  text "Y" at 31,958 h20
  text "X" at 153,923 h20 r180
  text "5V2" at 239,172 h50
  text "VCC_IN" at 462,168 h50 r270
  text "GND" at 400,130 h50 r270
  text "VBAT" at 570,128 h50 r270
  text "G" at 238,126 h50
  text "GND" at 517,119 h50 r270
  text "5V1" at 237,82 h50
  text "G" at 233,38 h50
  text "Y" at 924.22,30.67 h20 r180
Mechanical 1:
  circle w5: c1633.86,59.06 r47.24
  circle w5: c59.06,1633.86 r47.24
  circle w5: c1633.86,1633.86 r47.24
  circle w5: c59.06,59.06 r47.24
  lines w5: 0,-0.74 1692.91,0 1692.91,1692.91 ; 0,0 0,1692.91 1692.91,1692.91 ; 1684.84,1684.84 1692.91,1692.91

## Text inside footprints (layer, text, board x,y; h text height)
BATT: Bottom Overlay "+" at 882.01,196.21 h40